# Altium PCB IPG_Rigid.PcbDoc (part 10 of 13)
Units mm, origin at the board's own origin, x right, y up, seen from the top; angles counter-clockwise.
Board outline 69.6 x 90.73 mm, 10 copper layers (TOP, DHOR, DVERT, GND 1, POWER, GND 2, GND 3, AVERT, AHOR, BOT), stack 1.198 mm thick; 745 components, 398 nets, 1997 pads, 2678 vias.
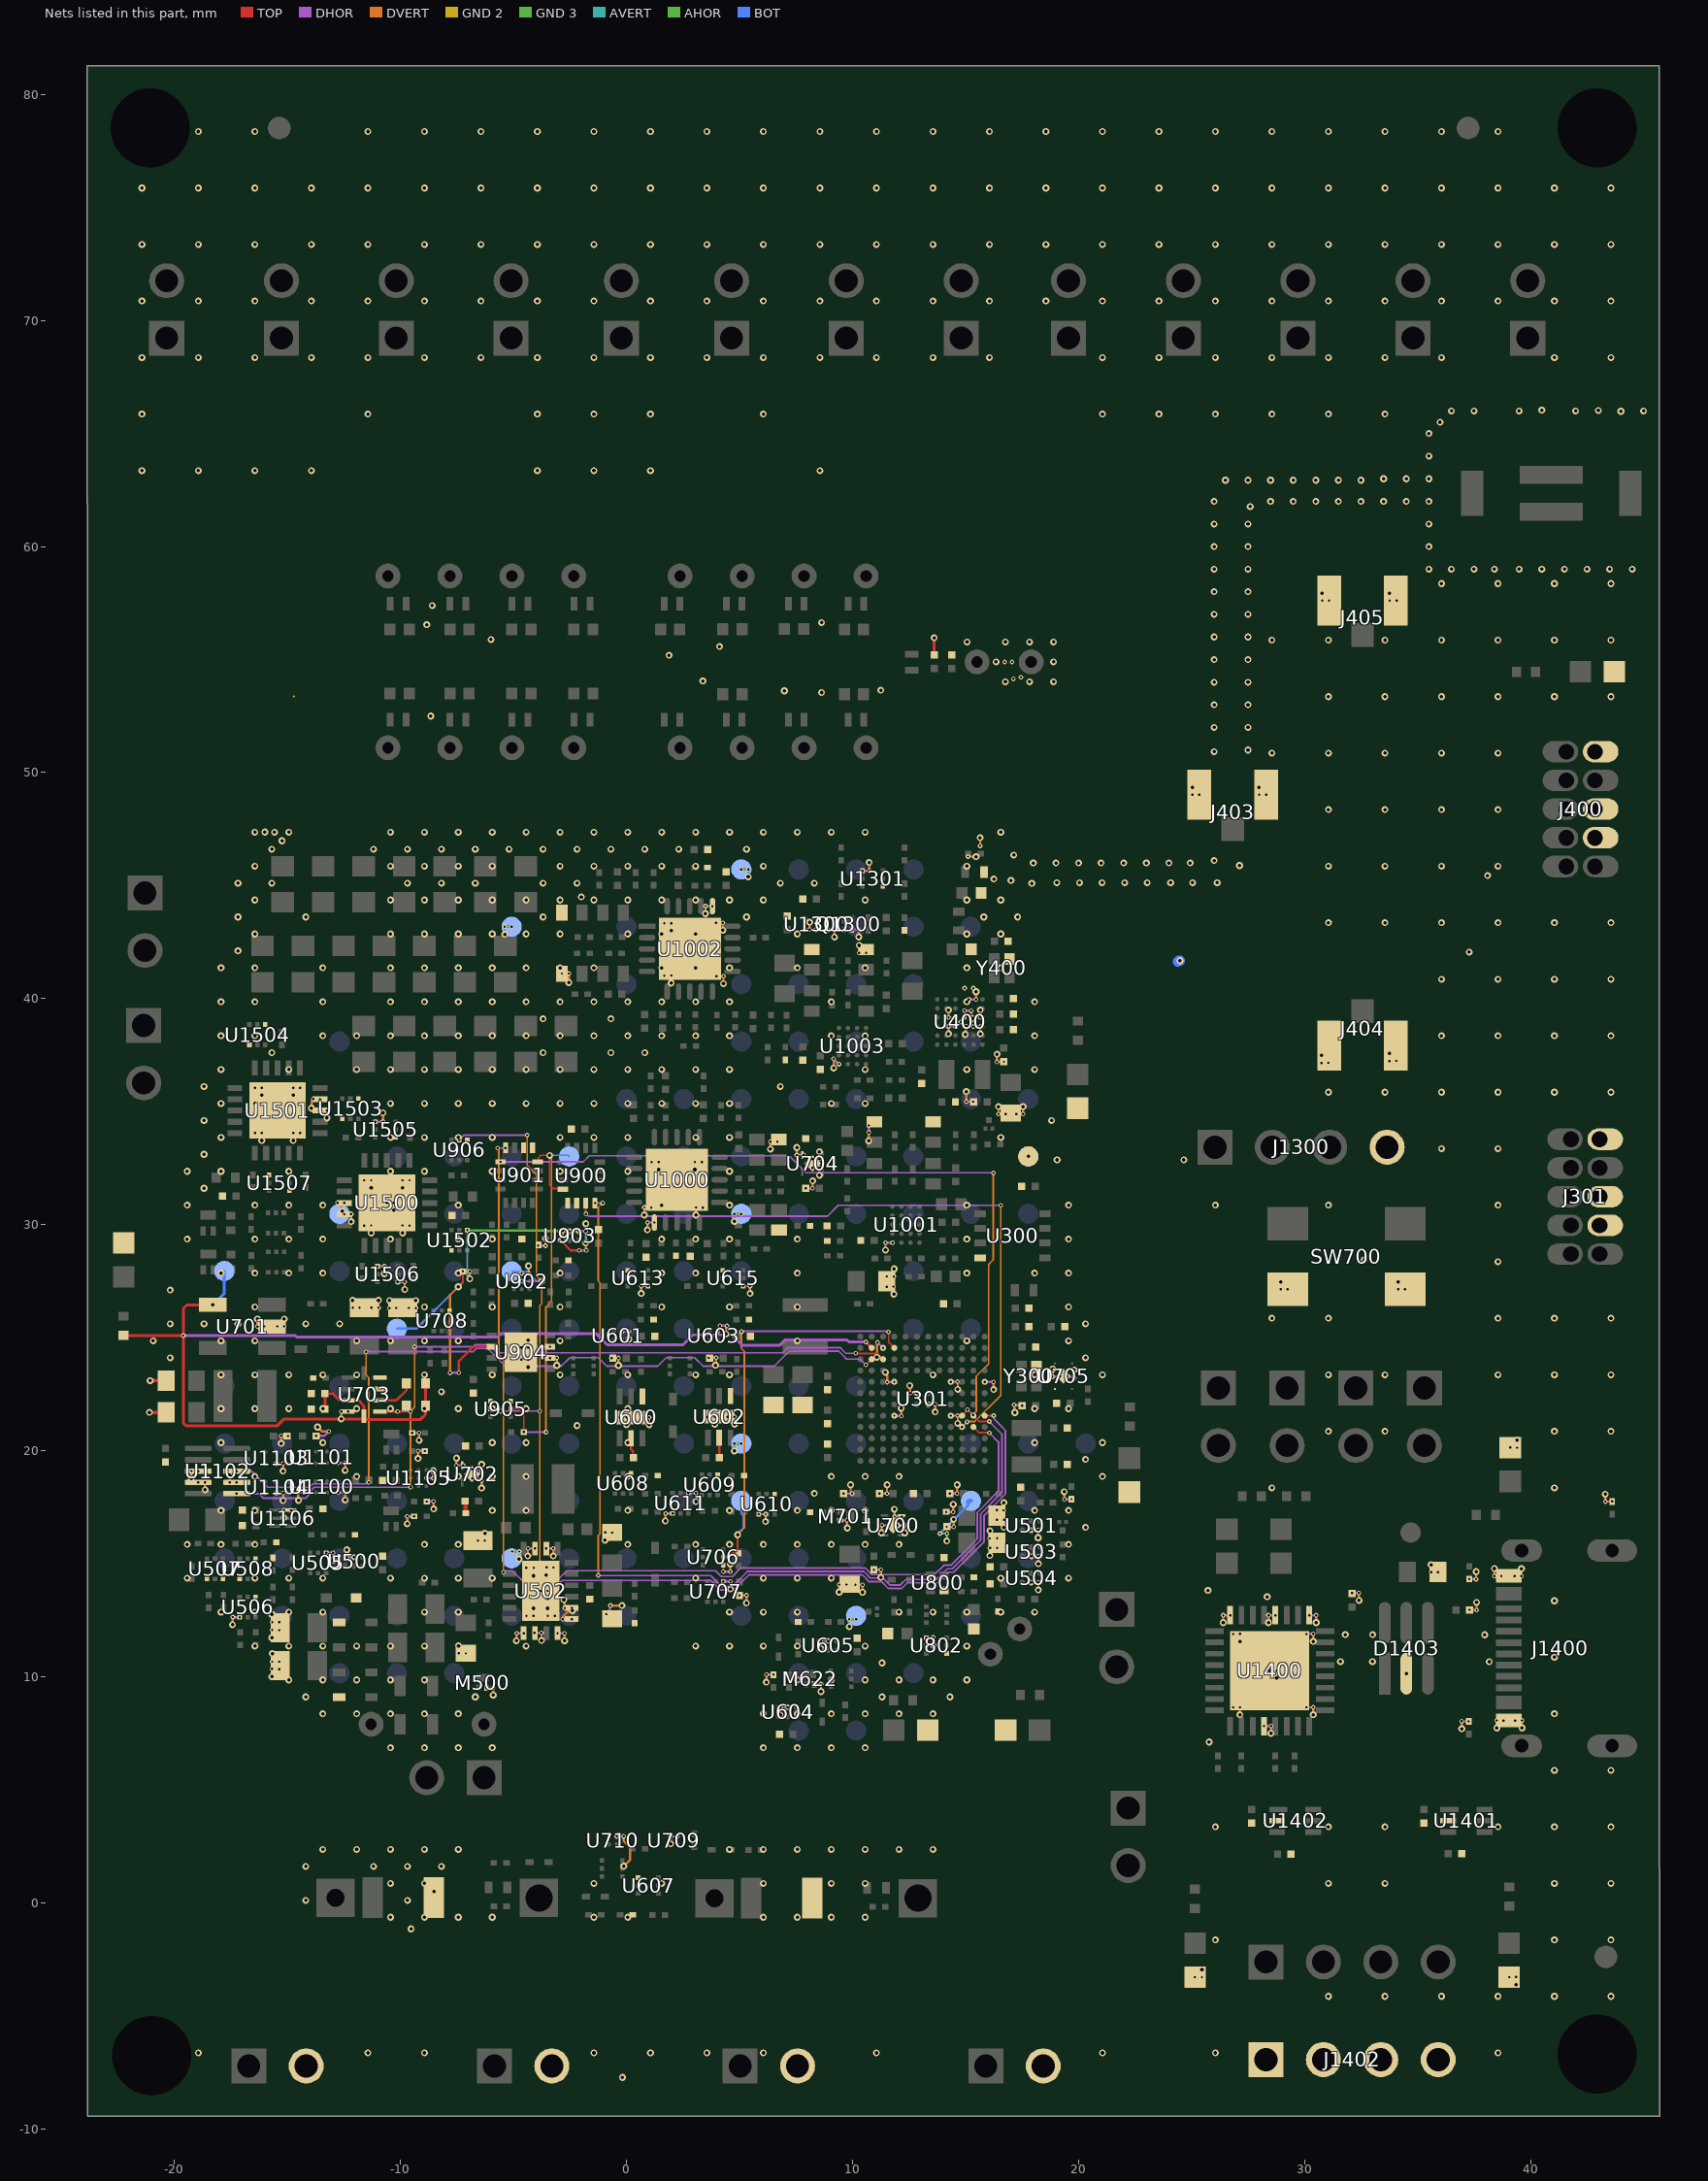
[diagram p14: the nets of this part, all layers, seen from the top]

## Via types
v1: diameter 0.203, hole 0.102, TOP to DHOR, tented top, 561 vias
v2: diameter 0.203, hole 0.102, DHOR to DVERT, tented top, 481 vias
v3: diameter 0.305/0.305/0.305/0.305/0.305/0.305 (per signal layer), hole 0.152, DVERT to AVERT, 397 vias
v4: diameter 0.305/0.305/0/0.305/0.305/0.305 (per signal layer), hole 0.152, DVERT to AVERT, tented top, 283 vias
v5: diameter 0.305/0.305/0.305/0.305/0/0.305/0.305/0.305/0.305/0.305 (per signal layer), hole 0.152, TOP to BOT, 259 vias
v6: diameter 0.305, hole 0.152, TOP to BOT, tented both sides, 169 vias
v7: diameter 0.305/0.305/0.305/0.305/0/0.305/0.305/0.305/0.305/0.305 (per signal layer), hole 0.152, TOP to BOT, tented both sides, 140 vias
v8: diameter 0.203, hole 0.102, AVERT to AHOR, tented top, 101 vias
v9: diameter 0.305/0.305/0.305/0.305/0.305/0.305 (per signal layer), hole 0.152, DVERT to AVERT, tented top, 79 vias
v10: diameter 0.305/0/0/0.305/0/0.305/0.305/0/0/0.305 (per signal layer), hole 0.152, TOP to BOT, tented both sides, 74 vias
v11: diameter 0.305/0.305/0.305/0.305/0.305/0.305/0.305/0.305/0.305/0.305 (per signal layer), hole 0.152, TOP to BOT, tented both sides, 66 vias
v12: diameter 0.203, hole 0.102, AHOR to BOT, tented both sides, 31 vias
v13: diameter 0.203, hole 0.102, DHOR to DVERT, tented both sides, 9 vias
v14: diameter 0.203/0.203 (per signal layer), hole 0.102, DHOR to DVERT, tented top, 7 vias
v15: diameter 0.203/0.203 (per signal layer), hole 0.102, TOP to DHOR, tented top, 7 vias
v16: diameter 0.203, hole 0.102, TOP to DHOR, tented both sides, 5 vias
v17: diameter 0.305, hole 0.152, DVERT to AVERT, tented both sides, 2 vias
v18: diameter 0.305/0.305/0/0.305/0.305/0.305 (per signal layer), hole 0.152, DVERT to AVERT, tented both sides, 2 vias
v19: diameter 0.305, hole 0.152, DVERT to AVERT, tented top, 2 vias
v20: diameter 0.305/0/0/0.305/0.305/0.305/0.305/0/0/0.305 (per signal layer), hole 0.152, TOP to BOT, tented both sides, 1 vias
v21: diameter 0.305/0.305/0/0.305/0.305/0.305 (per signal layer), hole 0.152, DVERT to AVERT, 1 vias
v22: diameter 0.203, hole 0.102, TOP to BOT, tented top, 1 vias

## Nets (pads, with @x,y where several pads share a name; then routed paths per layer and width w, separated by ;. In a path a pad name is that pad's centre, name@x,y a point inside that pad or via, vN(x,y) a via of type N, cw(c..) or ccw(c..) an arc to the next point about the centre after c; other vN are vias at no path point) (continued)
GND: C300.1 C301.2 C302.1 C303.2 C304.1 C305.1 C306.1 C307.1 C308.1 C309.1 C310.1 C311.1 C312.1 C313.2 C314.2 C315.1 C316.1 C317.2 C318.1 C319.2 C320.1 C400.2 C401.1 C402.1 C403.2 C404.1 C405.2 C406.1 C407.1 C408.1 C409.1 C410.2 C504.1 C505.1 C508.2 C509.2 C510.1 C511.1 C512.2 C514.1 C515.1 C516.1 C517.1 C600.2 C601.1 C602.1 C603.2 C604.1 C605.1 C606.1 C607.1 C700.1 C701.2 C702.2 C703.2 C704.2 C705.2 C706.1 C707.1 C708.1 C709.1 C710.1 C711.1 C712.1 C713.1 C714.1 C800.2 C801.1 C802.1 C900.1 C901.1 C902.1 C903.1 C906.1 C1003.1 C1004.1 C1005.1 C1006.1 C1018.2 C1019.1 C1020.1 C1021.2 C1100.1 C1102.1 C1109.1 C1112.1 C1114.1 C1115.1 C1117.1 C1200.1 C1215.1 C1300.1 C1302.1 C1400.2 C1401.1 C1402.1 C1404.2 C1405.1 C1406.1 C1407.1 C1500.1 C1501.1 D301.K D401.K D402.K D502.2 D503.2 D504.2 D704.K D705.K D802.K D1004.2 D1005.2 D1006.2 D1007.2 D1012.2 D1013.2 D1014.2 D1015.2 D1400.K D1401.K D1402.K D1403.2 F600.2 F601.2 J301.3 J301.5 J301.9 J400.3 J400.5 J400.9 J403.2 J403.3 J404.2 J404.3 J405.2 J405.3 J504.2 J505.2 J602.2 J605.2 J1300.4 J1400.A1 J1400.A12 J1402.1 J1402.2 J1402.3 J1402.4 L401.1 M500.2 M622.2 M701.2 Q1300.2 R301.1 R508.1 R511.2 R512.2 R517.2 R520.2 R523.2 R604.2 R610.1 R617.2 R622.1 R624.1 R627.2 R630.2 R702.2 R711.2 R716.1 R717.1 R804.2 R914.2 R1008.2 R1010.2 R1039.1 R1041.2 R1149.2 R1150.1 R1152.2 R1153.1 R1305.1 R1405.2 R1409.2 R1410.2 SW700.3 SW700.4 TP609.1 TP610.1 TP611.1 TP612.1 TP613.1 TP614.1 TP615.1 TP616.1 TP617.1 TP625.1 U300.4 U301.E4 U301.E9 U301.F6 U301.G7 U301.H1 U301.H4 U301.H9 U301.L10 U400.B3 U400.B4 U400.C1 U400.D3 U400.D4 U400.E3 U400.E4 U500.B1 U501.B1 U502.7 U502.8 U502.10 U502.11 U502.12 U502.18 U502.19 U502.21 U503.B1 U504.B1 U505.1 U506.1 U506.4 U507.1 U507.3 U508.1 U508.4 U600.1 U600.5 U600.7 U601.B2 U602.1 U602.5 U602.7 U603.B2 U604.B1 U605.B1 U607.1 U608.1 U609.1 U610.1 U610.4 U611.1 U611.4 U613.1 U613.4 U615.1 U615.4 U700.2 U700.5 U701.2 U702.2 U702.5 U703.3 U703.4 U703.9 U704.2 U704.5 U705.3 U705.5 U706.1 U707.1 U708.1 U709.B2 U710.B2 U800.4 U802.1 U802.4 U900.5 U900.6 U901.5 U901.6 U902.A2 U903.B1 U904.6 U904.9 U905.1 U906.1 U1000.16 U1000.21 U1001.A1 U1002.16 U1002.21 U1003.A1 U1100.1 U1100.4 U1101.4 U1102.3 U1102.4 U1102.7 U1103.2 U1104.2 U1105.A2 U1106.3 U1300.2 U1300.3 U1301.1 U1301.4 U1400.4 U1400.17 U1400.20 U1400.24 U1400.33 U1401.2 U1402.2 U1500.3 U1500.4 U1500.21 U1501.3 U1501.4 U1501.21 U1502.1 U1502.4 U1503.1 U1503.4 U1504.1 U1504.4 U1505.1 U1505.4 U1506.1 U1506.4 U1507.1 U1507.4 Y300.4 Y400.4 | length 140.4
  TOP w0.076: U603.B2@4.031,25.262 4.054,25.286 4.054,25.421 4.133,25.5 v1(4.133,25.534) ; U706.1@4.283,14.941 4.285,14.939 4.285,14.653 v1(4.288,14.65) ; C1021.2@4.4,45.545 C1021.2@4.4,45.63 ; C1006.1@10.332,29.308 C1006.1@10.337,29.304
  TOP w0.102: U507.1@-18.575,14.346 U507.1@-18.562,14.333 ; U507.3@-17.875,14.346 U507.3@-17.862,14.333 ; U506.4@-17.13,12.651 U506.4@-17.117,12.638 ; U508.1@-17.127,14.346 U508.1@-17.114,14.333 ; U506.1@-16.417,13.538 U506.1@-16.38,13.574 ; D504.2@-12.728,9.113 D504.2@-12.715,9.1 ; D503.2@-12.728,12.413 D503.2@-12.715,12.4 ; U500.B1@-12.072,15.284 U500.B1@-12.065,15.291 v1(-12.058,15.298) ; C512.2@-7.315,11.047 C512.2@-7.302,11.034 ; C512.2@-6.909,11.024 C512.2@-6.896,11.036 ; U502.7@-4.563,11.938 v1(-4.548,11.925) ; U502.8@-4.05,11.925 U502.8@-4.037,11.938 ; v1(-2.425,12.55) U502.11@-2.412,12.537 ; U502.12@-2.425,13.05 U502.12@-2.412,13.063 ; U600.5@0.2,20.55 0.2,20.058 0.3,19.958 C600.2@0.3,19.7 ; C603.2@4.1,19.7 4.102,19.7 4.102,20.575 U602.5@4.1,20.575 ; v1(9.398,37.1) U1003.A1@9.4,37.1 ; v1(14.793,38.968) 14.793,38.948 14.953,38.788 U400.D4@14.953,38.768 ; v1(14.949,39.466) 14.951,39.464 14.951,39.17 14.949,39.168 U400.D3@14.953,39.168
  TOP w0.127: C1200.1@13.614,55.208 v5(13.614,55.962) ; C410.2@17.141,38.612 C410.2@17.151,38.621
  TOP w0.152: v10(-21.076,23.1) C702.2@-20.375,23.1 ; v10@-21.028,21.7 C701.2@-20.375,21.7
  TOP w0.203: C707.1@-7.133,17.774 -7.123,17.765 -7.123,17.244 R716.1@-7.114,17.234
  TOP w0.5: v11(-8.509,0.506) F600.2@-8.331,0.327
  GND 3 w0.127: v21@16.346,37.541 v21(16.394,37.541)
  DVERT w0.102: v4(-19.253,18.771) v2(-19.253,19.102) ; v4(-18.647,18.271) v2(-18.647,18.602) ; v2(-17.553,18.598) v4(-17.553,18.929) ; v4@-17.43,12.328 -17.424,12.333 -17.424,12.634 v2(-17.418,12.64) ; v2(-16.33,25.498) v4(-16.33,25.829) ; v4(-16.138,33.725) v2(-16.138,34.056) ; v4(-16.138,35.725) v2(-16.138,36.056) ; v4(-15.686,12.762) -15.68,12.757 -15.68,12.425 v2(-15.675,12.42) ; v4@-15.684,11.757 -15.68,11.76 -15.68,12.069 v2(-15.677,12.072) ; v4@-15.682,10.03 v2(-15.682,10.352) ; v2(-15.674,10.669) v4(-15.674,11.024) ; v4(-15.28,20.326) v2(-15.28,20.657) ; v4(-15.197,17.796) v2(-15.197,18.127) ; v4(-15.197,19.103) v2(-15.197,19.433) ; v4(-15.162,17.039) v2(-15.162,17.37) ; v2(-15.147,25.5) v4(-15.147,25.831) ; v4(-14.748,33.725) v2(-14.748,34.056) ; v4(-14.748,35.725) v2(-14.748,36.056) ; v2(-14.553,18.148) -14.534,18.129 -14.534,17.826 v4(-14.514,17.806) ; v4(-13.945,35.154) -13.929,35.169 -13.929,35.458 -13.861,35.526 v2(-13.861,35.554) ; v3(-13.667,21.047) -13.469,20.849 v2(-13.176,20.849) ; v4(-13.255,34.723) v2(-13.255,35.054) ; v2@-12.986,15.491 -12.981,15.485 -12.981,15.184 v4@-12.975,15.179 ; v2(-12.79,30.967) -12.79,30.951 -12.618,30.779 -12.618,30.639 v4(-12.579,30.6) ; v4(-12.619,21.405) v2(-12.619,21.736) ; v4(-12.447,17.821) v2(-12.447,18.152) ; v4(-12.447,19.128) v2(-12.447,19.458) ; v2@-12.374,15.278 v4@-12.374,15.605 ; v4(-12.18,30.136) v2(-12.18,30.467) ; v2(-12.114,26.325) v4(-12.114,26.656) ; v4(-11.295,29.636) v2(-11.295,29.967) ; v4(-11.295,31.636) v2(-11.295,31.967) ; v2(-10.975,26.323) v4(-10.975,26.654) ; v2(-10.776,34.562) v3(-10.776,34.95) ; v4(-10.713,27.834) v2(-10.713,28.165) ; v2(-10.488,26.312) v4(-10.488,26.643) ; v4(-10.295,30.636) v2(-10.295,30.967) ; v4(-9.905,29.636) v2(-9.905,29.967) ; v4(-9.905,31.636) v2(-9.905,31.967) ; v4(-9.813,27.134) v2(-9.813,27.465) ; v4(-9.704,16.767) v2(-9.704,17.098) ; v2(-9.324,26.314) v4(-9.324,26.645) ; v4(-9.225,19.66) v2(-9.225,19.991) ; v4(-9.179,20.46) v2(-9.179,20.791) ; v2(-8.547,18.785) v4(-8.547,19.116) ; v4(-8.534,17.428) v2(-8.534,17.759) ; v2(-7.526,19.345) v4(-7.526,19.676) ; v4@-7.427,11.342 -7.426,11.341 v2(-7.424,11.035) v2(-7.424,11.035) ; v4(-6.411,18.345) v2(-6.411,18.676) ; v2(-6.411,19.068) v4(-6.411,19.399) ; v2@-6.271,16.021 -6.266,16.027 -6.266,16.327 v4@-6.26,16.333 ; v4(-5.897,9.188) v2(-5.897,9.518) ; v4@-4.865,11.617 -4.859,11.623 -4.859,11.923 v2(-4.854,11.929) ; v4@-4.365,15.367 -4.359,15.373 -4.359,15.673 v2(-4.354,15.679) ; v4(-4.345,23.7) v2(-4.345,24.03) ; v2(-4.345,24.56) v4(-4.345,24.891) ; v2(-4.333,27.843) v4(-4.333,28.174) ; v2@-4.121,12.696 -4.116,12.702 -4.116,13.002 v4@-4.11,13.008 ; v4@-4.111,14.493 -4.111,14.825 v2(-4.106,14.829) ; v2@-3.767,11.943 -3.761,11.937 -3.761,11.636 v4@-3.755,11.631 ; v4@-3.55,14.526 -3.544,14.531 -3.544,14.832 v2(-3.539,14.838) ; v2(-3.495,13.804) -3.491,13.798 -3.491,13.498 v4@-3.485,13.492 ; v4@-3.49,13.008 -3.484,13.002 -3.484,12.702 v2(-3.479,12.696) ; v2@-3.246,15.679 -3.241,15.673 -3.241,15.373 v4@-3.235,15.367 ; v4(-3.084,23.775) v2(-3.084,24.106) ; v2(-2.824,12.55) -2.804,12.57 -2.804,12.675 -2.592,12.887 -2.427,12.887 v4(-2.389,12.925) ; v4(-2.82,29.385) v2(-2.82,29.716) ; v4(-2.772,13.407) -2.748,13.383 -2.748,13.066 v2(-2.729,13.046) ; v2(-2.745,11.929) -2.741,11.923 -2.741,11.623 v4@-2.735,11.617 ; v3(-2.554,40.716) v2(-2.554,41.112) ; v4@-0.95,16.071 -0.945,16.077 -0.945,16.378 v2(-0.939,16.383) ; v2(-0.711,13.154) v4(-0.199,13.154) ; v4(-0.359,23.773) v2(-0.359,24.104) ; v2(-0.129,2.943) -0.129,2.744 0.165,2.45 0.165,1.909 v9(-0.12,1.624) ; v4(0.005,21.148) v2(0.005,21.479) ; v4(0.104,24.936) v2(0.104,25.266) ; v4(0.653,26.958) v2(0.653,27.289) ; v4(0.789,30.431) v2(0.789,30.761) ; v4(0.927,29.769) v2(0.927,30.1) ; v4(1.005,21.148) v2(1.005,21.479) ; v4(1.421,32.437) v2(1.421,32.768) ; v4@1.725,16.918 1.73,16.924 1.73,17.225 v2(1.736,17.23) ; v9(1.955,2.612) v2(1.955,2.943) ; v4(1.979,40.692) v2(1.979,41.023) ; v4(1.979,43.004) v2(1.979,43.334) ; v4(3.024,32.437) v2(3.024,32.768) ; v4(3.071,17.753) 3.072,17.754 v2(3.073,18.126) v2(3.073,18.126) ; v4(3.075,30.431) v2(3.075,30.761) ; v4(3.495,43.764) v2(3.495,44.094) ; v4(3.905,21.173) v2(3.905,21.504) ; v4(3.937,23.783) 3.952,23.798 3.952,24.097 v2(3.968,24.112) ; v4(4.265,43.029) v2(4.265,43.36) ; v4(4.291,40.667) v2(4.291,40.998) ; v4(4.406,25.161) 4.406,25.455 4.447,25.496 v2(4.447,25.523) ; v2@4.597,14.657 4.594,14.66 4.594,14.96 v4@4.597,14.962 ; v4@4.598,13.909 v2@4.598,14.218 ; v4(4.78,21.173) v2(4.78,21.504) ; v4@5.313,13.291 5.314,13.292 5.314,13.607 v2(5.315,13.608) ; v4(5.468,26.957) v2(5.468,27.288) ; v4(6.156,16.865) v2(6.156,17.196) ; v4@6.188,9.783 6.193,9.788 6.193,10.089 v2(6.199,10.095) ; v4(6.367,33.342) v2(6.367,33.673) ; v2(6.809,8.649) 6.812,8.646 6.812,8.34 v4@6.816,8.337 ; v2(7.537,33.084) v4(7.537,33.414) ; v2(8.103,43.05) v4(8.103,43.381) ; v2(8.235,31.609) v4(8.235,31.939) ; v4(8.535,32.186) v2(8.535,32.516) ; v2(8.535,32.896) v4(8.535,33.227) ; v4@8.6,11.275 v2(8.6,11.582) ; v4(8.606,9.346) v2(8.606,9.677) ; v4(9.169,36.932) v2(9.169,37.338) ; v4(9.201,42.723) v2(9.201,43.054) ; v4@9.415,13.773 v2(9.415,14.079) ; v2(9.754,16.921) 9.759,16.915 9.759,16.614 v4@9.765,16.609 ; v3(9.917,18.491) 9.917,18.191 9.982,18.126 v2(9.982,18.099) ; v4(10.276,42.733) v2(10.276,43.064) ; v2(10.299,42.026) v4(10.299,42.357) ; v4@10.447,13.762 v2(10.447,14.07) ; v3(10.719,33.706) v2(10.719,34.087) ; v2(10.74,45.657) v3(10.74,46.025) ; v4(11.074,24.13) 11.089,24.145 11.089,24.776 v2(11.104,24.79) ; v2(11.25,14.739) 11.255,14.733 11.255,14.432 v4@11.26,14.427 ; v4@11.285,16.392 11.291,16.398 11.291,16.698 v2(11.296,16.704) ; v4(11.454,23.464) 11.454,23.409 11.539,23.325 11.539,23.039 v2(11.543,23.035) ; v4(11.462,28.877) v2(11.462,29.208) ; v2(11.528,18.107) v3(11.528,18.491) ; v4@11.82,26.957 v2@11.82,27.258 ; v2(11.825,27.709) 11.831,27.715 11.831,28.016 v4@11.836,28.021 ; v4@11.86,17.396 11.866,17.39 11.866,17.09 v2(11.871,17.084) ; v4(12.151,21.886) 12.153,21.884 12.153,21.548 v2@12.154,21.546 ; v2@12.304,16.704 12.309,16.698 12.309,16.398 v4@12.315,16.392 ; v4@12.535,22.858 12.538,22.855 12.538,22.554 v2(12.542,22.551) ; v2(13.57,11.737) 13.574,11.733 13.574,11.423 v4@13.579,11.419 ; v2@13.654,22.054 13.659,22.048 13.659,21.748 v4@13.665,21.742 ; v4(14.251,38.441) v2(14.251,38.772) ; v2(14.251,39.164) v4(14.251,39.495) ; v2(14.453,17.293) 14.457,17.299 14.457,17.6 v4@14.463,17.605 ; v4(14.469,16.959) 14.473,16.956 14.473,16.626 v2(14.476,16.623) ; v2(14.631,18.106) v3(14.631,18.491) ; v2@14.654,21.554 14.659,21.548 14.659,21.248 v4@14.665,21.242 ; v2@14.654,23.054 14.659,23.048 14.659,22.748 v4@14.665,22.742 ; v4(14.99,38.417) 15.016,38.443 15.016,38.756 v2(15.035,38.776) ; v2@15.037,35.469 v18(15.037,35.89) ; v13(15.112,46.284) v9(15.468,46.284) ; v2(15.254,39.462) 15.265,39.451 15.265,39.113 v4(15.275,39.102) ; v4@15.454,40.306 15.456,40.304 v4@15.456,40.208 ; v2@15.456,39.971 v2@15.466,39.961 ; v2(15.466,39.967) v4(15.466,40.306) ; v13(15.646,46.761) v9(15.646,47.117) ; v4(15.654,38.441) v2(15.654,38.772) ; v2(15.654,39.164) v4(15.654,39.495) ; v2(16.063,16.119) 16.071,16.127 16.071,16.424 v4@16.084,16.437 ; v4@16.082,15.39 v2@16.082,15.696 ; v2(16.237,23.047) 16.243,23.041 16.243,22.74 v4@16.25,22.733 ; v2(16.394,37.201) v21(16.394,37.541) ; v2(16.463,34.896) v4(16.463,35.226) ; v2(16.695,17.365) 16.696,17.366 16.696,17.68 v4@16.698,17.682 ; v4@16.698,16.634 16.702,16.639 16.702,16.941 v2(16.707,16.946) ; v2(17.153,22.035) 17.168,22.021 17.168,21.706 v4(17.182,21.691) ; v2(17.548,34.896) v4(17.548,35.226) ; v2(18.215,16.494) 18.218,16.491 18.218,16.181 v4@18.22,16.178 ; v2(18.221,14.175) 18.223,14.174 18.223,13.867 v4@18.225,13.865 ; v4@18.229,15.022 18.233,15.026 18.233,15.329 v2(18.237,15.332) ; v2(18.844,23.27) 18.852,23.278 18.852,23.589 v4@18.864,23.602 ; v4@19.372,18.166 19.374,18.163 19.374,17.852 v2(19.377,17.849) ; v4@19.816,23.59 19.816,23.224 v2(19.821,23.22) ; v2(25.042,49.018) v4(25.042,49.349) ; v2(25.461,-3.29) v4(25.461,-2.959) ; v4(26.406,12.394) v2(26.406,12.725) ; v4(27.143,8.32) v2(27.143,8.651) ; v4(27.143,11.566) v2(27.143,11.897) ; v2(27.992,49.018) v4(27.992,49.349) ; v4(28.406,12.394) v2(28.406,12.725) ; v4(28.516,7.492) v2(28.516,7.823) ; v4(28.766,9.943) v2(28.766,10.274) ; v2(28.947,27.14) v4(28.947,27.471) ; v4(30.389,8.32) v2(30.389,8.651) ; v4(30.389,11.566) v2(30.389,11.897) ; v4(30.516,12.394) v2(30.516,12.725) ; v2(30.748,37.156) v4(30.748,37.487) ; v2(30.783,57.608) v4(30.783,57.939) ; v4(32.411,13.374) v2(32.411,13.705) ; v2(33.758,37.241) v4(33.758,37.572) ; v2(33.768,57.603) v4(33.768,57.934) ; v2(34.147,27.14) v4(34.147,27.471) ; v2(35.6,14.626) v4(35.6,14.957) ; v4(36.957,7.7) v2(36.957,8.031) ; v2(37.592,14.321) v4(37.592,14.652) ; v2(37.611,12.959) v4(37.611,13.29) ; v2(38.399,14.459) v4(38.399,14.79) ; v4(38.506,7.738) v2(38.506,8.069) ; v4(39.361,-3.613) v2(39.361,-3.282) ; v2(39.411,20.138) v4(39.411,20.469) ; v2(39.599,14.457) v4(39.599,14.788) ; v4(39.624,7.736) v2(39.624,8.067) ; v2(43.307,17.751) v4(43.307,18.082)
  GND 2 w0.305: v9(-15.24,46.981) v9@-15.24,46.99
  AVERT w0.102: v4@-5.392,42.875 v8@-5.392,43.176 ; v4@-4.748,15.236 v8@-4.748,15.536 ; v4@4.769,20.015 v8@4.769,20.316 ; v4@4.769,30.176 v8@4.769,30.476 ; v4@5.392,45.415 v8@5.392,45.716 ; v4@9.848,12.242 v8@9.848,12.543 ; v4@14.179,16.033 v8@14.179,16.333
  DHOR w0.102: v2@-19.252,19.102 -19.25,19.1 -18.95,19.1 v1(-18.948,19.098) ; v1(-18.952,18.598) -18.95,18.6 -18.65,18.6 v2@-18.648,18.602 ; v2@-17.552,18.598 -17.55,18.6 -17.25,18.6 v1(-17.248,18.602) ; v2(-17.418,12.64) -17.416,12.638 -17.117,12.638 v1@-17.115,12.636 ; v1(-16.443,34.052) -16.441,34.054 -16.142,34.054 v2(-16.138,34.056) ; v1(-16.443,36.052) -16.441,36.054 -16.142,36.054 v2(-16.138,36.056) ; v2(-16.33,25.498) -16.327,25.5 -16.027,25.5 v1(-16.025,25.502) ; v2(-15.682,10.352) -15.675,10.345 -15.374,10.345 v1(-15.367,10.338) ; v2(-15.677,12.072) -15.674,12.069 -15.373,12.069 v1(-15.369,12.065) ; v2(-15.675,12.42) v1(-15.367,12.421) ; v2@-15.673,10.668 v1(-15.367,10.668) ; v1(-15.502,18.123) -15.5,18.125 -15.2,18.125 v2@-15.198,18.127 ; v1(-15.502,19.429) -15.5,19.431 -15.2,19.431 v2@-15.198,19.433 ; v1(-15.452,25.504) -15.45,25.502 -15.15,25.502 v2@-15.148,25.5 ; v2(-15.28,20.657) -15.276,20.655 -14.976,20.655 v1(-14.975,20.653) ; v2(-15.162,17.37) -15.159,17.368 -14.859,17.368 v1(-14.857,17.366) ; v2(-14.748,34.056) -14.745,34.054 -14.445,34.054 v1(-14.443,34.052) ; v2(-14.748,36.056) -14.745,36.054 -14.445,36.054 v1(-14.443,36.052) ; v2(-14.553,18.148) -14.55,18.15 -14.25,18.15 v1(-14.248,18.152) ; v2(-13.861,35.554) -13.858,35.552 -13.558,35.552 v1(-13.556,35.55) ; v1(-13.736,20.667) -13.357,20.667 v2(-13.176,20.849) ; v1(-13.56,35.05) -13.558,35.052 -13.259,35.052 v2@-13.257,35.054 ; v1(-13.29,15.487) -13.288,15.489 -12.988,15.489 v2@-12.986,15.491 ; v2(-12.79,30.967) -12.787,30.965 -12.487,30.965 v1(-12.485,30.963) ; v1(-12.752,18.148) -12.75,18.15 -12.45,18.15 v2@-12.448,18.152 ; v1(-12.752,19.454) -12.75,19.456 -12.45,19.456 v2@-12.448,19.458 ; v2@-12.617,21.736 -12.615,21.734 -12.316,21.734 v1(-12.314,21.732) ; v1(-12.485,30.463) -12.483,30.465 -12.184,30.465 v2@-12.182,30.467 ; v2(-12.374,15.277) -12.364,15.288 -12.068,15.288 v1(-12.058,15.298) ; v2(-12.114,26.325) -12.111,26.327 -11.811,26.327 v1(-11.809,26.329) ; v1(-11.6,29.963) -11.598,29.965 -11.299,29.965 v2(-11.295,29.967) ; v1(-11.6,31.963) -11.598,31.965 -11.299,31.965 v2(-11.295,31.967) ; v1(-11.28,26.327) -11.278,26.325 -10.978,26.325 v2(-10.975,26.323) ; v1(-11.118,34.558) -11.116,34.56 -10.779,34.56 v2@-10.777,34.562 ; v1(-11.018,28.161) -11.016,28.163 -10.717,28.163 v2(-10.713,28.165) ; v1(-10.6,30.963) -10.598,30.965 -10.299,30.965 v2@-10.297,30.967 ; v2(-10.488,26.312) -10.485,26.314 -10.185,26.314 v1(-10.183,26.316) ; v1(-10.118,27.461) -10.116,27.463 -9.817,27.463 v2@-9.815,27.465 ; v2@-9.904,29.967 -9.902,29.965 -9.602,29.965 v1(-9.6,29.963) ; v2@-9.904,31.967 -9.902,31.965 -9.602,31.965 v1(-9.6,31.963) ; v2(-9.704,17.098) -9.7,17.096 -9.401,17.096 v1(-9.399,17.094) ; v1(-9.629,26.318) -9.627,26.316 -9.327,26.316 v2(-9.324,26.314) ; v1(-9.484,20.787) -9.482,20.789 -9.182,20.789 v2(-9.179,20.791) ; v2@-9.224,19.991 -9.222,19.989 -8.922,19.989 v1(-8.92,19.987) ; v1(-8.852,18.789) -8.85,18.787 -8.55,18.787 v2(-8.547,18.785) ; v1(-8.839,17.755) -8.837,17.757 -8.537,17.757 v2(-8.534,17.759) ; v2@-7.524,19.345 -7.522,19.347 -7.223,19.347 v1(-7.221,19.349) ; v2(-7.424,11.035) v1@-7.113,11.035 ; v1(-6.833,18.774) -6.831,18.776 -6.51,18.776 v2(-6.411,18.676) ; v1(-6.833,19.174) -6.831,19.172 -6.514,19.172 v2(-6.411,19.068) ; v1(-6.575,16.025) -6.573,16.023 -6.273,16.023 v2@-6.271,16.021 ; v2@-6.414,18.674 v2(-6.411,18.676) ; v2@-6.414,19.07 v2(-6.411,19.068) ; v1(-6.202,9.514) -6.2,9.516 -5.901,9.516 v2(-5.897,9.518) ; v2(-4.854,11.929) -4.852,11.927 -4.552,11.927 v1(-4.548,11.925) ; v1(-4.65,24.026) -4.648,24.028 -4.349,24.028 v2(-4.345,24.03) ; v1(-4.65,24.564) -4.648,24.562 -4.349,24.562 v2(-4.345,24.56) ; v1(-4.638,27.847) -4.636,27.845 -4.336,27.845 v2(-4.333,27.843) ; v1(-4.431,14.824) -4.428,14.826 -4.109,14.826 v2(-4.106,14.829) ; v1(-4.425,12.7) -4.423,12.698 -4.123,12.698 v2@-4.121,12.696 ; v2(-4.354,15.679) -4.352,15.677 -4.052,15.677 v1(-4.049,15.675) ; v1(-4.07,11.939) -4.068,11.941 -3.768,11.941 v2@-3.767,11.943 ; v1(-3.8,13.8) -3.798,13.802 -3.498,13.802 v2(-3.495,13.804) ; v1(-3.55,15.675) -3.548,15.677 -3.248,15.677 v2@-3.246,15.679 ; v2(-3.539,14.838) -3.537,14.836 -3.237,14.836 v1@-3.235,14.834 ; v2(-3.479,12.696) -3.477,12.698 -3.177,12.698 v1@-3.175,12.7 ; v1(-3.389,24.102) -3.387,24.104 -3.087,24.104 v2@-3.085,24.106 ; v1(-3.05,11.925) -3.048,11.927 -2.748,11.927 v2(-2.745,11.929) ; v1(-2.859,41.108) -2.857,41.11 -2.557,41.11 v2@-2.555,41.112 ; v2(-2.824,12.55) v1(-2.425,12.55) ; v2@-2.818,29.716 -2.816,29.714 -2.517,29.714 v1(-2.515,29.712) ; v2(-2.729,13.046) -2.727,13.048 -2.427,13.048 v1@-2.425,13.05 ; v2(-0.939,16.383) -0.937,16.381 -0.638,16.381 v1(-0.634,16.379) ; v1(-0.892,12.773) -0.891,12.802 -0.731,12.962 -0.731,13.135 v2(-0.711,13.154) ; v1(-0.664,24.1) -0.662,24.102 -0.362,24.102 v2@-0.36,24.104 ; v1(-0.434,2.939) -0.432,2.941 -0.132,2.941 v2(-0.129,2.943) ; v1(-0.3,21.475) -0.298,21.477 0.002,21.477 v2@0.004,21.479 ; v1(-0.202,25.262) -0.2,25.264 0.1,25.264 v2@0.102,25.266 ; v2@0.654,27.289 0.656,27.287 0.956,27.287 v1(0.958,27.285) ; v1(0.7,21.475) 0.702,21.477 1.002,21.477 v2@1.004,21.479 ; v2(0.789,30.761) 0.793,30.759 1.092,30.759 v1(1.094,30.757) ; v2@0.929,30.1 0.931,30.098 1.23,30.098 v1(1.232,30.096) ; v1(1.116,32.764) 1.118,32.766 1.417,32.766 v2(1.421,32.768) ; v1(1.674,41.019) 1.676,41.021 1.976,41.021 v2(1.979,41.023) ; v1(1.674,43.33) 1.676,43.332 1.976,43.332 v2(1.979,43.334) ; v2(1.736,17.23) 1.738,17.228 2.038,17.228 v1@2.04,17.226 ; v2(1.955,2.943) 1.958,2.941 2.258,2.941 v1(2.26,2.939) ; v1(2.736,18.126) v2(3.073,18.126) ; v2(3.024,32.768) 3.028,32.766 3.327,32.766 v1(3.329,32.764) ; v2(3.075,30.761) 3.079,30.759 3.378,30.759 v1(3.38,30.757) ; v2@3.496,44.094 3.498,44.093 3.798,44.093 v1(3.8,44.091) ; v1(3.6,21.5) 3.602,21.502 3.902,21.502 v2@3.904,21.504 ; v1(3.632,24.11) 3.633,24.111 v2(3.968,24.112) v2(3.968,24.112) ; v1(3.96,43.356) 3.962,43.358 4.262,43.358 v2(4.265,43.36) ; v1(3.986,40.994) 3.988,40.996 4.287,40.996 v2(4.291,40.998) ; v1(4.133,25.534) 4.138,25.529 4.442,25.529 v2(4.447,25.523) ; v1(4.283,14.217) 4.284,14.218 4.598,14.218 v2(4.599,14.219) ; v1(4.288,14.65) 4.29,14.652 4.589,14.652 v2@4.593,14.656 ; v1(4.475,21.5) 4.477,21.502 4.777,21.502 v2@4.779,21.504 ; v1(4.999,13.599) 5.003,13.603 5.311,13.603 v2(5.315,13.608) ; v1(5.163,27.284) 5.165,27.286 5.465,27.286 v2@5.467,27.288 ; v1(5.851,17.192) v1(5.851,17.192) 6.153,17.194 v2@6.155,17.196 ; v2(6.199,10.095) v2(6.199,10.095) 6.5,10.093 v1@6.502,10.091 ; v2(6.367,33.673) 6.371,33.671 6.67,33.671 v1(6.672,33.669) ; v2(6.809,8.649) 6.811,8.647 7.128,8.647 v1(7.13,8.645) ; v2@7.538,33.084 7.54,33.086 7.84,33.086 v1(7.842,33.088) ; v1(7.93,31.613) 7.932,31.611 8.231,31.611 v2@8.233,31.609 ; v2@8.104,43.05 8.106,43.052 8.406,43.052 v1(8.408,43.054) ; v1(8.23,32.513) 8.232,32.515 8.531,32.515 v2(8.535,32.516) ; v1(8.23,32.9) 8.232,32.898 8.531,32.898 v2(8.535,32.896) ; v1(8.301,9.673) 8.303,9.675 8.603,9.675 v2(8.606,9.677) ; v2(8.6,11.582) v1(8.915,11.582) ; v1(8.896,43.05) 8.898,43.052 9.198,43.052 v2@9.2,43.054 ; v2(9.169,37.338) 9.169,37.329 v1(9.398,37.1) ; v2(9.415,14.079) v1@9.73,14.08 ; v1@9.45,16.917 9.452,16.919 9.752,16.919 v2(9.754,16.921) ; v1(9.6,18.1) v2(9.982,18.099) ; v1(9.971,43.06) 9.973,43.062 10.273,43.062 v2@10.275,43.064 ; v1(10.133,14.07) v2@10.447,14.07 ; v2(10.299,42.026) 10.302,42.028 10.602,42.028 v1(10.604,42.03) ; v1(10.435,45.653) 10.437,45.655 10.737,45.655 v2@10.739,45.657 ; v2(10.719,34.087) 10.72,34.088 v1(10.721,34.392) v1(10.721,34.392) ; v1(10.945,14.735) 10.947,14.737 11.247,14.737 v2(11.25,14.739) ; v2(11.104,24.79) 11.108,24.79 11.349,24.549 v1(11.352,24.549) ; v1(11.2,18.1) 11.203,18.103 11.524,18.103 v2(11.528,18.107) ; v2(11.296,16.704) v2(11.296,16.704) 11.598,16.702 v1@11.6,16.7 ; v2(11.462,29.208) 11.465,29.206 11.765,29.206 v1(11.767,29.204) ; v1@11.513,27.262 v2@11.813,27.262 ; v1(11.52,27.713) 11.524,27.711 11.823,27.711 v2(11.825,27.709) ; v2(11.543,23.035) 11.55,23.043 11.843,23.043 v1(11.85,23.05) ; v1(11.85,21.55) 11.852,21.548 12.152,21.548 v2@12.154,21.546 ; v2(11.871,17.084) 11.873,17.086 12.173,17.086 v1@12.175,17.088 ; v1(12,16.7) 12.002,16.702 12.302,16.702 v2@12.304,16.704 ; v2(12.542,22.551) v1(12.85,22.55) ; v1(13.264,11.727) 13.269,11.732 13.565,11.732 v2(13.57,11.737) ; v1(13.35,22.05) 13.352,22.052 13.652,22.052 v2@13.654,22.054 ; v1(14.148,17.297) 14.15,17.295 14.45,17.295 v2(14.453,17.293) ; v1(14.168,16.637) 14.175,16.63 14.469,16.63 v2(14.476,16.623) ; v2(14.251,38.772) 14.255,38.77 14.555,38.77 v1(14.556,38.768) ; v2(14.251,39.164) 14.255,39.166 14.555,39.166 v1(14.556,39.168) ; v1(14.3,18.1) 14.303,18.103 14.627,18.103 v2(14.631,18.106) ; v1(14.35,21.55) 14.352,21.552 14.652,21.552 v2@14.654,21.554 ; v1(14.35,23.05) 14.352,23.052 14.652,23.052 v2@14.654,23.054 ; v1(14.793,38.968) 14.818,38.968 15.01,38.776 v2(15.035,38.776) ; v1(14.949,39.466) 14.951,39.464 15.25,39.464 v2(15.254,39.462) ; v2@15.038,35.442 15.04,35.444 15.34,35.444 v1(15.342,35.446) ; v1(15.152,39.967) 15.153,39.966 15.461,39.966 v2@15.466,39.961 ; v1(15.349,38.768) 15.351,38.77 15.65,38.77 v2@15.652,38.772 ; v1(15.349,39.168) 15.351,39.166 15.65,39.166 v2@15.652,39.164 ; v1(15.85,23.05) 15.851,23.049 v2(16.237,23.047) v2(16.237,23.047) ; v2(16.063,16.119) 16.068,16.124 16.394,16.124 v1(16.399,16.129) ; v2@16.082,15.697 v1@16.397,15.697 ; v1(16.383,16.942) 16.385,16.944 16.705,16.944 v2(16.707,16.946) ; v1(16.383,17.374) 16.387,17.369 16.691,17.369 v2(16.695,17.365) ; v2(16.394,37.201) 16.398,37.203 16.697,37.203 v1(16.699,37.205) ; v2(16.463,34.896) 16.466,34.898 16.766,34.898 v1(16.768,34.9) ; v2(17.153,22.035) 17.174,22.015 17.485,22.015 v1(17.502,21.998) ; v1(17.243,34.9) 17.245,34.898 17.544,34.898 v2@17.546,34.896 ; v1(17.906,16.486) 17.91,16.49 18.211,16.49 v2(18.215,16.494) ; v1(17.91,14.173) 17.912,14.174 18.22,14.174 v2(18.221,14.175) ; v1(17.915,15.33) 17.916,15.331 v2(18.237,15.332) v2(18.237,15.332) ; v2(18.844,23.27) 18.856,23.282 19.167,23.282 v1(19.179,23.294) ; v2(19.377,17.849) 19.381,17.854 19.683,17.854 v1(19.687,17.858) ; v1(19.502,23.292) 19.521,23.272 19.741,23.272 19.794,23.22 v2(19.821,23.22) ; v2@25.044,49.018 25.046,49.02 25.345,49.02 v1(25.347,49.022) ; v1(25.156,-3.286) 25.158,-3.288 25.457,-3.288 v2@25.459,-3.29 ; v2@26.407,12.725 26.409,12.723 26.709,12.723 v1(26.711,12.721) ; v1(26.838,8.647) 26.84,8.649 27.139,8.649 v2(27.143,8.651) ; v1(26.838,11.893) 26.84,11.895 27.139,11.895 v2(27.143,11.897) ; v2(27.992,49.018) 27.996,49.02 28.295,49.02 v1(28.297,49.022) ; v1(28.211,7.819) 28.213,7.821 28.512,7.821 v2@28.514,7.823 ; v2@28.407,12.725 28.409,12.723 28.709,12.723 v1(28.711,12.721) ; v1(28.461,10.27) 28.463,10.272 28.762,10.272 v2(28.766,10.274) ; v2@28.948,27.14 28.95,27.142 29.25,27.142 v1(29.252,27.144) ; v1(30.084,8.647) 30.086,8.649 30.385,8.649 v2(30.389,8.651) ; v1(30.084,11.893) 30.086,11.895 30.385,11.895 v2(30.389,11.897) ; v1(30.211,12.721) 30.213,12.723 30.512,12.723 v2(30.516,12.725) ; v2(30.748,37.156) 30.751,37.158 31.051,37.158 v1(31.053,37.16) ; v2@30.784,57.608 30.786,57.61 31.086,57.61 v1(31.088,57.612) ; v1(32.106,13.701) 32.108,13.703 32.407,13.703 v2(32.411,13.705) ; v2(33.758,37.241) 33.761,37.243 34.061,37.243 v1(34.063,37.245) ; v2@33.769,57.603 33.771,57.605 34.071,57.605 v1(34.073,57.607) ; v2(34.147,27.14) 34.15,27.142 34.45,27.142 v1(34.452,27.144) ; v2(35.6,14.626) 35.603,14.628 35.903,14.628 v1(35.905,14.63) ; v2@36.958,8.031 36.96,8.029 37.26,8.029 v1(37.262,8.027) ; v1(37.287,14.325) 37.289,14.323 37.589,14.323 v2(37.592,14.321) ; v1(37.306,12.963) 37.308,12.961 37.608,12.961 v2@37.61,12.959 ; v2(38.399,14.459) 38.403,14.461 38.702,14.461 v1(38.704,14.463) ; v2@38.508,8.069 38.51,8.067 38.809,8.067 v1(38.811,8.065) ; v1(39.056,-3.286) 39.058,-3.284 39.357,-3.284 v2(39.361,-3.282) ; v1(39.106,20.142) 39.108,20.14 39.408,20.14 v2(39.411,20.138) ; v1(39.294,14.461) 39.296,14.459 39.595,14.459 v2(39.599,14.457) ; v1(39.319,8.063) 39.321,8.065 39.621,8.065 v2(39.624,8.067) ; v2@43.308,17.751 43.31,17.753 43.61,17.753 v1(43.612,17.755)
  AHOR w0.102: v8@-5.388,43.179 v12(-5.08,43.18) ; v12(-5.059,15.541) v8(-4.75,15.539) ; v8(4.771,20.319) v12(5.08,20.32) ; v8(4.772,30.479) v12(5.081,30.481) ; v12(5.08,45.72) v8@5.388,45.719 ; v8@9.852,12.547 v12(10.16,12.548) ; v12(13.868,16.338) v8(14.177,16.336)
  BOT w0.127: v12(13.868,16.338) 15.109,17.578 TP617.1@15.109,17.724
  BOT w0.2: TP617.1@15.109,17.724 15.165,17.78 TP617.1@15.24,17.78
  BOT w0.45: v6@24.387,41.631 24.437,41.681 v6(24.486,41.681)
  other v1: 6.504,10.091 -7.112,11.034 -17.113,12.636 -3.174,12.7 -2.424,13.05 9.73,14.08 -3.234,14.834 16.397,15.697 11.602,16.7 9.449,16.917 12.176,17.088 2.041,17.226 11.51,27.26 14.959,40.462 15.346,40.462
  other v2: -3.765,11.943 -4.12,12.696 4.594,14.654 -12.985,15.491 -3.245,15.679 16.081,15.696 -6.27,16.021 12.305,16.704 12.155,21.546 14.655,21.554 13.655,22.054 14.655,23.054 11.815,27.264 15.037,35.442
  other v3: -10.441,-0.638 -8.941,-0.638 -7.441,-0.638 -5.941,-0.638 -1.441,-0.638 0.059,-0.638 6.059,-0.638 7.559,-0.638 9.059,-0.638 10.559,-0.638 -10.441,0.862 -8.941,0.862 -1.441,0.862 1.559,0.862 6.059,0.862 9.059,0.862 10.559,0.862 -13.441,2.362 -11.941,2.362 -10.441,2.362 -8.941,2.362 -7.441,2.362 4.559,2.362 6.059,2.362 7.559,2.362 9.059,2.362 10.559,2.362 12.059,2.362 13.559,2.362 -10.441,6.862 -8.941,6.862 -7.441,6.862 -5.941,6.862 6.059,6.862 7.559,6.862 9.059,6.862 10.559,6.862 -13.441,8.362 -11.941,8.362 -10.441,8.362 -8.941,8.362 -7.441,8.362 6.059,8.362 7.559,8.362 9.059,8.362 10.559,8.362 12.059,8.362 13.559,8.362 -14.941,9.862 -13.441,9.862 -11.941,9.862 -10.441,9.862 -8.941,9.862 7.559,9.862 9.059,9.862 10.559,9.862 12.059,9.862 13.559,9.862 15.059,9.862 -16.441,11.362 -14.941,11.362 -13.441,11.362 -11.941,11.362 -10.441,11.362 -8.941,11.362 -4.441,11.362 3.059,11.362 4.559,11.362 6.059,11.362 7.559,11.362 10.559,11.362 15.059,11.362 -17.941,12.862 -16.441,12.862 -14.941,12.862 -13.441,12.862 -8.941,12.862 -7.441,12.862 4.559,12.862 6.059,12.862 7.559,12.862 12.059,12.862 13.559,12.862 15.059,12.862 16.559,12.862 18.059,12.862 -19.441,14.362 -16.441,14.362 -14.941,14.362 -13.441,14.362 -10.441,14.362 -8.941,14.362 -7.441,14.362 -5.941,14.362 3.059,14.362 6.059,14.362 7.559,14.362 9.059,14.362 13.559,14.362 16.559,14.362 19.559,14.362 -19.441,15.862 -17.941,15.862 -16.441,15.862 -8.941,15.862 -7.441,15.862 0.059,15.862 3.059,15.862 4.559,15.862 6.059,15.862 7.559,15.862 9.059,15.862 10.559,15.862 12.059,15.862 19.559,15.862 -17.941,17.362 -16.441,17.362 -5.941,17.362 -4.441,17.362 0.059,17.362 4.559,17.362 7.559,17.362 9.059,17.362 10.559,17.362 18.059,17.362 19.559,17.362 -16.441,18.862 -11.941,18.862 -7.441,18.862 -5.941,18.862 -4.441,18.862 0.059,18.862 9.059,18.862 10.559,18.862 12.059,18.862 21.059,18.862 -17.941,20.362 -13.441,20.362 -5.941,20.362 -4.441,20.362 0.059,20.362 18.059,20.362 21.059,20.362 -17.941,21.862 -16.441,21.862 -14.941,21.862 -13.441,21.862 -11.941,21.862 -10.441,21.862 -8.941,21.862 -7.441,21.862 -5.941,21.862 -4.441,21.862 0.059,21.862 18.059,21.862 19.559,21.862 -17.941,23.362 -16.441,23.362 -14.941,23.362 -13.441,23.362 -11.941,23.362 -8.941,23.362 -5.941,23.362 -2.941,23.362 0.059,23.362 3.059,23.362 4.559,23.362 13.559,23.362 18.059,23.362 21.059,23.362 -20.941,24.862 -17.941,24.862 -16.441,24.862 -11.941,24.862 -10.441,24.862 -8.941,24.862 -7.441,24.862 -2.941,24.862 7.559,24.862 15.059,24.862 19.559,24.862 -16.441,26.362 -8.941,26.362 -5.941,26.362 -2.941,26.362 1.559,26.362 4.559,26.362 7.559,26.362 19.559,26.362 -17.941,27.862 -16.441,27.862 -14.941,27.862 -13.441,27.862 -7.441,27.862 -2.941,27.862 1.559,27.862 3.059,27.862 7.559,27.862 15.059,27.862 18.059,27.862 19.559,27.862 -19.441,29.362 -16.441,29.362 -14.941,29.362 -13.441,29.362 -10.441,29.362 -7.441,29.362 -5.941,29.362 1.559,29.362 3.059,29.362 4.559,29.362 7.559,29.362 15.059,29.362 19.559,29.362 -19.441,30.862 -16.441,30.862 -14.941,30.862 -13.441,30.862 -7.441,30.862 1.559,30.862 4.559,30.862 15.059,30.862 19.559,30.862 -19.441,32.362 -17.941,32.362 -14.941,32.362 -10.441,32.362 -8.941,32.362 -5.941,32.362 -2.941,32.362 0.059,32.362 4.559,32.362 -17.941,33.862 -10.441,33.862 -8.941,33.862 -7.441,33.862 -5.941,33.862 -2.941,33.862 -1.441,33.862 0.059,33.862 3.059,33.862 4.559,33.862 16.559,33.862 -17.941,35.362 -16.441,35.362 -10.441,35.362 -8.941,35.362 -7.441,35.362 -5.941,35.362 -4.441,35.362 -2.941,35.362 -1.441,35.362 0.059,35.362 1.559,35.362 3.059,35.362 4.559,35.362 9.059,35.362 10.559,35.362 -17.941,36.862 -14.941,36.862 -11.941,36.862 -10.441,36.862 -8.941,36.862 -7.441,36.862 -5.941,36.862 -4.441,36.862 -2.941,36.862 -1.441,36.862 0.059,36.862 1.559,36.862 3.059,36.862 4.559,36.862 10.559,36.862 15.059,36.862 18.059,36.862 -17.941,38.362 -16.441,38.362 -13.441,38.362 -11.941,38.362 -10.441,38.362 -8.941,38.362 -7.441,38.362 -5.941,38.362 -4.441,38.362 -2.941,38.362 -1.441,38.362 0.059,38.362 1.559,38.362 3.059,38.362 4.559,38.362 9.059,38.362 10.559,38.362 18.059,38.362 -17.941,39.862 -16.441,39.862 -13.441,39.862 -10.441,39.862 -8.941,39.862 -7.441,39.862 -5.941,39.862 -4.441,39.862 -2.941,39.862 -1.441,39.862 0.059,39.862 1.559,39.862 3.059,39.862 4.559,39.862 9.059,39.862 15.059,39.862 18.059,39.862 -17.941,41.362 -16.441,41.362 -13.441,41.362 -10.441,41.362 -8.941,41.362 -7.441,41.362 -5.941,41.362 -4.441,41.362 -2.941,41.362 -1.441,41.362 1.559,41.362 3.059,41.362 4.559,41.362 7.559,41.362 10.559,41.362 15.059,41.362 16.559,41.362 -16.441,42.862 -10.441,42.862 -8.941,42.862 -7.441,42.862 -5.941,42.862 -4.441,42.862 -2.941,42.862 0.059,42.862 1.559,42.862 3.059,42.862 7.559,42.862 15.059,42.862 16.559,42.862 -16.441,44.362 -10.441,44.362 -8.941,44.362 -7.441,44.362 -5.941,44.362 -4.441,44.362 -2.941,44.362 -1.441,44.362 0.059,44.362 1.559,44.362 3.059,44.362 4.559,44.362 6.059,44.362 10.559,44.362 15.059,44.362 16.559,44.362 -16.441,45.862 -10.441,45.862 -8.941,45.862 -7.441,45.862 -5.941,45.862 -2.941,45.862 -1.441,45.862 0.059,45.862 1.559,45.862 3.059,45.862 6.059,45.862 15.059,45.862 -16.441,47.362 -14.941,47.362 -10.441,47.362 -8.941,47.362 -7.441,47.362 -5.941,47.362 -4.441,47.362 -2.941,47.362 -1.441,47.362 0.059,47.362 1.559,47.362 3.059,47.362 4.559,47.362 6.059,47.362 7.559,47.362 9.059,47.362 10.559,47.362 16.559,47.362
  other v4: 6.811,8.312 6.183,9.758 -15.687,10.005 8.596,11.249 -7.432,11.367 13.574,11.394 -4.87,11.592 -3.76,11.606 -2.74,11.592 -15.689,11.732 9.855,12.216 -17.435,12.303 -4.115,13.028 -3.495,13.028 5.308,13.266 -3.49,13.467 9.411,13.747 10.442,13.737 18.22,13.84 4.593,13.884 11.255,14.402 -4.115,14.467 -3.555,14.501 4.595,14.99 18.224,14.997 -12.98,15.154 -4.754,15.209 -4.37,15.342 -3.24,15.342 16.077,15.364 -12.378,15.616 14.173,16.006 -0.955,16.046 18.215,16.153 -6.265,16.353 11.28,16.367 12.31,16.367 16.079,16.457 9.77,16.584 16.693,16.609 1.72,16.893 11.855,17.416 14.458,17.625 16.693,17.702 19.367,18.186 4.775,19.988 14.66,21.217 13.66,21.717 16.245,22.708 14.66,22.717 12.53,22.883 19.811,23.575 18.859,23.622 11.831,26.932 11.841,28.046 4.776,30.149 -5.385,42.848 5.385,45.388
  other v5: -18.941,-6.638 -11.441,-6.638 -8.941,-6.638 -1.441,-6.638 1.059,-6.638 3.559,-6.638 6.059,-6.638 11.059,-6.638 21.059,-6.638 26.059,-6.638 38.559,-6.638 31.059,-4.138 33.559,-4.138 36.059,-4.138 38.559,-4.138 41.059,-4.138 43.559,-4.138 26.059,-1.638 41.059,-1.638 43.559,-1.638 31.059,0.862 33.559,0.862 41.059,0.862 43.559,0.862 26.059,3.362 31.059,3.362 33.559,3.362 38.559,3.362 41.059,3.362 43.559,3.362 41.059,5.862 43.559,5.862 41.059,8.362 41.059,10.862 41.059,13.362 28.559,18.362 41.059,18.362 31.059,20.862 33.559,20.862 41.059,20.862 43.559,20.862 31.059,23.362 33.559,23.362 38.559,23.362 41.059,23.362 43.559,23.362 28.559,25.862 31.059,25.862 38.559,25.862 41.059,25.862 43.559,25.862 38.559,28.362 26.059,30.862 31.059,30.862 38.559,30.862 36.059,33.362 38.559,33.362 31.059,35.862 33.559,35.862 36.059,35.862 38.559,35.862 41.059,35.862 43.559,35.862 36.059,38.362 38.559,38.362 41.059,38.362 43.559,38.362 36.059,40.862 38.559,40.862 41.059,40.862 43.559,40.862 31.059,43.362 33.559,43.362 36.059,43.362 38.559,43.362 41.059,43.362 43.559,43.362 -2,44.5 31.059,45.862 33.559,45.862 36.059,45.862 38.559,45.862 31.059,48.362 33.559,48.362 36.059,48.362 38.559,48.362 28.559,50.862 31.059,50.862 33.559,50.862 36.059,50.862 38.559,50.862 31.059,53.362 33.559,53.362 36.059,53.362 38.559,53.362 41.059,53.362 43.559,53.362 28.559,55.862 31.059,55.862 33.559,55.862 36.059,55.862 38.559,55.862 41.059,55.862 43.559,55.862 36.059,58.362 38.559,58.362 41.059,58.362 43.559,58.362 -21.441,63.362 -18.941,63.362 -16.441,63.362 -13.941,63.362 -3.941,63.362 -1.441,63.362 1.059,63.362 8.559,63.362 -21.441,65.862 -11.441,65.862 -3.941,65.862 -1.441,65.862 1.059,65.862 6.059,65.862 21.059,65.862 23.559,65.862 26.059,65.862 28.559,65.862 31.059,65.862 33.559,65.862 -21.441,68.362 -18.941,68.362 -16.441,68.362 -13.941,68.362 -11.441,68.362 -8.941,68.362 -6.441,68.362 -3.941,68.362 -1.441,68.362 1.059,68.362 3.559,68.362 6.059,68.362 8.559,68.362 11.059,68.362 13.559,68.362 16.059,68.362 21.059,68.362 23.559,68.362 26.059,68.362 28.559,68.362 31.059,68.362 33.559,68.362 36.059,68.362 41.059,68.362 43.559,68.362 -21.441,70.862 -18.941,70.862 -16.441,70.862 -13.941,70.862 -11.441,70.862 -8.941,70.862 -6.441,70.862 -3.941,70.862 -1.441,70.862 1.059,70.862 3.559,70.862 6.059,70.862 8.559,70.862 11.059,70.862 13.559,70.862 16.059,70.862 18.559,70.862 21.059,70.862 23.559,70.862 26.059,70.862 28.559,70.862 31.059,70.862 33.559,70.862 36.059,70.862 38.559,70.862 41.059,70.862 43.559,70.862 -21.441,73.362 -18.941,73.362 -16.441,73.362 -13.941,73.362 -11.441,73.362 -8.941,73.362 -6.441,73.362 -3.941,73.362 -1.441,73.362 1.059,73.362 3.559,73.362 6.059,73.362 8.559,73.362 11.059,73.362 13.559,73.362 16.059,73.362 18.559,73.362 21.059,73.362 23.559,73.362 26.059,73.362 28.559,73.362 31.059,73.362 33.559,73.362 36.059,73.362 38.559,73.362 41.059,73.362 43.559,73.362 -21.441,75.862 -18.941,75.862 -16.441,75.862 -13.941,75.862 -11.441,75.862 -8.941,75.862 -6.441,75.862 -3.941,75.862 -1.441,75.862 1.059,75.862 3.559,75.862 6.059,75.862 8.559,75.862 11.059,75.862 13.559,75.862 16.059,75.862 18.559,75.862 21.059,75.862 23.559,75.862 26.059,75.862 28.559,75.862 31.059,75.862 33.559,75.862 36.059,75.862 38.559,75.862 41.059,75.862 43.559,75.862 -18.941,78.362 -16.441,78.362 -11.441,78.362 -8.941,78.362 -6.441,78.362 -3.941,78.362 -1.441,78.362 1.059,78.362 3.559,78.362 6.059,78.362 8.559,78.362 11.059,78.362 13.559,78.362 16.059,78.362 18.559,78.362 21.059,78.362 23.559,78.362 26.059,78.362 28.559,78.362 31.059,78.362 33.559,78.362 36.059,78.362 38.559,78.362
  other v6: -0.178,-7.722 25.781,7.112 28.346,13.538 25.73,13.818 32.639,28.448 19.05,32.868 24.663,32.868 37.287,42.062 17.937,45.098 19.042,45.129 20.042,45.129 21.042,45.129 22.042,45.129 23.042,45.129 24.075,45.129 25.045,45.129 26.136,45.129 17.01,45.226 16.256,45.296 38.1,45.441 27.126,45.888 18,46 19,46 20,46 21,46 22,46 23,46 24,46 24.943,46 26,46.11 17.133,46.355 -16.002,47.371 -15.57,47.362 26,50.928 27.5,51 26,52 27.5,52 -8.661,52.502 26,53 27.5,53 8.636,53.543 6.985,53.619 11.252,53.644 26,54 27.5,54 18.898,54.019 3.378,54.051 18.898,54.899 26,55 27.5,55 1.88,55.194 4.115,55.575 15.068,55.778 16.764,55.778 18.898,55.778 -5.996,55.884 26,56 27.5,56 -8.839,56.54 8.636,56.642 26,57 27.5,57 -8.594,57.389 26,58 27.5,58 26,59 27.5,59 35.5,59 36.5,59 37.5,59 38.399,59 39.5,59 40.5,59 41.5,59 42.5,59 43.5,59 44.5,59 26,60 27.5,60 35.5,60 26,61 27.5,61 35.5,61 27.596,61.768 26,62 28.5,62 29.5,62 30.5,62 31.5,62 32.5,62 33.5,62 34.5,62 35.5,62 26.5,62.934 27.5,62.934 28.5,62.934 29.5,62.934 30.5,62.934 31.5,62.934 32.5,62.934 33.5,63 34.5,63 35.5,63 35.5,64 35.5,65 36,65.5 44,65.985 36.5,66 37.5,66 39.5,66 42,66 45,66 40.5,66.035 43,66.022
  other v7: 31.59,10.672 33.006,10.672 38.176,10.666 31.803,11.865 33.01,11.865 37.973,11.859 17.78,33.02
  other v8: 9.851,12.546 -5.389,43.178 5.389,45.718
  other v9: 16.766,54.018 16.352,54.897
  other v10: -14.191,0.112 -9.691,0.112 -14.191,1.612 -11.191,1.612 -9.691,1.612 -8.191,1.612 -14.191,9.112 -6.691,9.112 11.309,9.112 14.309,9.112 11.309,10.612 20.309,16.612 8.309,18.112 20.309,19.612 -2.191,21.112 -21.107,21.7 -8.191,22.612 -20.191,24.112 20.309,24.112 -20.191,25.612 -18.691,25.612 -17.191,25.612 -14.191,25.612 -12.691,25.612 20.309,25.612 -20.191,27.112 -18.691,31.612 -18.691,33.112 -18.691,34.612 18.809,34.612 -18.691,36.112 6.809,36.112 -15.691,37.612 -3.691,37.612 -0.691,37.612 0.809,37.612 -3.691,39.112 -0.691,39.112 -17.191,42.112 -17.191,43.612 -14.191,43.612 -3.691,43.612 5.309,43.612 15.809,43.612 17.309,43.612 -17.191,45.112 -15.691,45.112 -9.691,45.112 -8.191,45.112 -6.691,45.112 -3.691,45.112 -2.191,45.112 6.809,45.112 8.309,45.112 -11.191,46.612 -9.691,46.612 -8.191,46.612 -6.691,46.612 -5.191,46.612 -3.691,46.612 -2.191,46.612 -0.691,46.612 0.809,46.612 2.309,46.612 5.309,46.612
  other v11: -9.534,-1.151 34.508,10.138 17.831,54.019 17.831,55.778
  other v13: 17.12,54.148 16.732,54.897
  other v16: 17.45,54.22 17.057,54.897
  other v20: -15.691,46.612
HPF_1V5: R910.1 R912.1 TP904.1 U903.A1 U903.C2 U904.2 | length 23.1
  TOP w0.102: v7(-7.442,27.254) -7.24,27.457 R910.1@-7.24,27.929 v1(-7.24,27.934) ; v1(-7.417,23.452) -7.417,23.969 -6.784,24.602 U904.2@-5.959,24.602 ; U903.C2@-2.915,29.312 -2.466,28.863 v1(-2.094,28.863)
  DVERT w0.102: v2(-7.804,23.446) -7.81,23.452 -7.81,26.887 v7(-7.442,27.254) ; v4(-6.935,27.607) v2(-6.935,27.938) ; v2(-3.587,29.065) v4(-3.587,29.396) ; v4(-1.804,29.189) -1.791,29.177 -1.791,28.871 v2(-1.778,28.858) ; v2(-1.803,29.714) v4(-1.803,30.045)
  AVERT w0.102: v8(-7.046,29.761) -7.046,27.773 -6.935,27.662 v4(-6.935,27.607) ; v4(-3.587,29.396) v8(-3.586,29.728) ; v4(-1.804,29.189) -1.803,29.7 v8(-1.81,29.707) -1.819,29.716 -1.807,29.729 -1.807,30.041 v4(-1.803,30.045)
  DHOR w0.102: v2(-7.804,23.446) -7.801,23.449 -7.42,23.449 v1(-7.417,23.452) ; v1(-7.24,27.934) -7.238,27.936 v2@-6.938,27.936 ; v1(-3.913,29.075) -3.908,29.07 -3.593,29.07 v2@-3.588,29.065 ; v1(-2.108,29.718) -2.106,29.716 -1.807,29.716 v2(-1.803,29.714) ; v1(-2.094,28.863) -2.091,28.86 -1.78,28.86 v2(-1.778,28.858)
  AHOR w0.102: v8(-7.046,29.761) -7.029,29.744 -3.602,29.744 v8(-3.586,29.728) -1.859,29.728 -1.838,29.707 v8(-1.81,29.707)
  BOT w0.102: TP904.1@-10.16,25.4 -9.296,25.4 v7(-7.442,27.254)
HV_EN: C713.2 C714.2 R707.1 R708.1 R715.2 TP708.1 U301.L11 U701.4 U703.8 U703.10 | length 57.7
  TOP w0.127: R715.2@-22.251,25.095 v1(-19.609,25.095) ; v7(-18.31,26.45) -19.45,26.45 -19.6,26.3 -19.609,26.291 v1(-19.609,25.095) ; C713.2@-13.34,21.844 C714.2@-13.34,22.53 -12.993,22.53 -12.707,22.244 -12.325,22.244 U703.8@-12.316,22.234 -11.866,22.234 -11.616,21.984 U703.10@-11.616,21.469 ; U703.10@-11.651,21.469 -11.651,21.41 -11.666,21.395 -15.17,21.395 -15.455,21.11 -19.495,21.11 -19.609,21.224 v1(-19.609,25.095) ; U703.10@-11.616,21.437 -11.566,21.387 -9.113,21.387 -8.891,21.609 R708.1@-8.891,22.984 ; v1(10.596,24.818) 10.596,24.811 10.85,24.557 U301.L11@10.85,24.55
  DHOR w0.127: v1@-19.6,25.104 -14.669,25.104 -14.59,25.025 -5.692,25.025 -5.527,25.19 -1.349,25.19 -0.848,24.689 2.503,24.689 2.942,25.128 4.658,25.128 5.127,24.658 6.773,24.658 7.007,24.892 9.767,24.892 9.851,24.809 10.587,24.809 v1(10.596,24.818)
  BOT w0.127: v7(-18.31,26.45) -17.795,26.965 TP708.1@-17.795,27.955
HVSW_EN: R710.1 TP710.1 U301.L9 U706.2 | length 19.9
  TOP w0.076: U706.2@4.283,15.291 4.508,15.291 4.688,15.471 R710.1@4.953,15.471 4.915,15.508 v7(4.915,16.281) ; v1(11.592,25.256) 11.599,25.249 11.599,24.801 U301.L9@11.85,24.55
  DVERT w0.076: v7(4.915,16.281) 5.216,16.582 5.216,24.401 5.086,24.531 v2(5.086,25.271)
  DHOR w0.076: v2(5.086,25.271) 5.103,25.289 11.525,25.289 11.558,25.256 v1(11.592,25.256)
  BOT w0.076: v7(4.915,16.281) 4.915,16.343 5.177,16.605 5.177,17.107 5.08,17.204 TP710.1@5.08,17.78 TP710.1@5.177,17.683
I2C2.SCL: R707.2 U301.K10 U703.1 U1102.6 | length 37.4
  TOP w0.076: v1(10.144,24.308) 10.151,24.301 11.099,24.301 U301.K10@11.35,24.05
  TOP w0.1: U703.1@-10.916,21.734 v1(-10.134,21.734) -9.891,21.734 -9.741,21.884 R707.2@-9.716,21.884
  DVERT w0.076: v2(-9.563,21.736) -9.558,21.73 -9.558,18.394 v2(-9.552,18.388) ; v2@-9.563,21.739 -9.378,21.924 v2(-9.378,24.6)
  DHOR w0.076: v1(-17.25,18.1) -16.26,18.1 -16.067,17.907 -14.188,17.907 -14.014,18.081 -14.014,18.194 -13.819,18.388 v2(-9.552,18.388) ; v1(-10.134,21.734) -9.891,21.734 -9.889,21.736 v2(-9.563,21.736) ; v2(-9.378,24.6) -6.788,24.6 -6.707,24.681 -6.082,24.681 -5.734,24.334 -1.202,24.334 -1.196,24.328 6.91,24.328 7.143,24.562 9.448,24.562 9.6,24.409 9.702,24.308 v1(10.144,24.308)
I2C2.SDA: R708.2 U301.K11 U703.2 U1102.8 | length 38.1
  TOP w0.076: v1(10.594,23.799) 10.599,23.799 U301.K11@10.85,24.05
  TOP w0.1: v1(-10.916,22.234) -10.176,22.234 -9.743,22.668 -9.743,22.857 R708.2@-9.716,22.884
  DVERT w0.076: v2(-11.517,24.372) -11.517,23.355 -11.405,23.242 v2@-11.405,18.608
  DHOR w0.076: v1(-17.25,19.101) -16.591,19.101 -15.879,18.388 -14.035,18.388 -13.882,18.54 -11.498,18.54 -11.434,18.604 v2(-11.4,18.604) ; v2(-11.517,24.372) -11.505,24.384 -6.788,24.384 -6.644,24.529 -6.145,24.529 -5.359,23.743 -2.882,23.743 -2.508,24.117 -1.247,24.117 -0.873,23.743 1.385,23.743 1.76,24.117 3.02,24.117 3.394,23.743 6.54,23.743 7.206,24.409 9.384,24.409 9.6,24.194 9.736,24.058 10.335,24.058 v1(10.594,23.799) ; v2(-11.405,22.225) -11.4,22.23 -10.92,22.23 v1(-10.916,22.234)
IMP_EN: TP902.1 U301.E1 U902.B2 U904.7 U905.2 U906.2 | length 56.2
  TOP w0.076: U905.2@-6.031,21.85 -5.715,21.85 -5.615,21.75 v1(-5.581,21.75) ; U301.E1@15.85,21.55 v1(16.25,21.55)
  DVERT w0.076: v2(-4.394,33.962) -4.394,32.629 -3.983,32.219 -3.983,27.736 v7(-3.745,27.497) -3.745,26.513 -3.835,26.423 v2(-3.835,24.587) v2(-3.835,21.757) -3.835,14.234 -3.782,14.18 -3.769,14.18 -3.667,14.078 v2(-3.632,14.078)
  DHOR w0.076: v1(-7.395,33.749) -7.177,33.967 -4.399,33.967 v2(-4.394,33.962) ; v1(-5.581,21.75) -5.577,21.754 -3.839,21.754 v2(-3.835,21.757) ; v1(-4.638,27.497) v7(-3.745,27.497) v7@-3.734,27.508 ; v2(-3.835,24.587) -3.828,24.595 -3.396,24.595 v1(-3.389,24.602) ; v2(-3.632,14.078) -3.038,14.078 -2.85,14.265 3.714,14.265 4.131,13.849 4.346,13.849 4.749,13.849 5.41,14.509 10.435,14.509 10.73,14.214 11.277,14.214 11.58,13.911 12.186,13.911 12.428,14.153 13.772,14.153 14.25,14.63 14.477,14.63 15.824,15.978 15.824,17.145 16.764,18.085 16.764,20.898 16.6,21.062 16.257,21.404 16.257,21.543 v1(16.25,21.55)
  BOT w0.076: TP902.1@-5.08,27.94 -4.42,27.94 -4.012,27.532 -3.78,27.532 v7(-3.745,27.497)
IMP_ENn: R903.2 TP906.1 U900.4 U901.4 U905.5 U905.6 | length 18.8
  TOP w0.076: U905.6@-5.131,22.2 U905.5@-5.131,21.85 -4.775,21.85 -4.546,21.62 v1(-4.546,20.828) ; U901.4@-3.935,32.781 -3.912,32.804 -3.912,32.944 -3.785,33.071 v7@-3.404,33.071 ; v7(-3.401,33.068) -3.401,32.662 -3.404,32.66 -3.404,31.75 -3.251,31.598 -2.845,31.598 U900.4@-2.819,31.572
  DVERT w0.076: v2(-3.563,20.824) -3.563,26.358 -3.32,26.601 -3.32,32.925 -3.401,33.006 v7(-3.401,33.068)
  DHOR w0.076: v1(-4.546,20.828) -4.544,20.826 v2(-3.563,20.824) v2(-3.563,20.824)
  BOT w0.076: v7(-3.401,33.068) -2.588,33.068 TP906.1@-2.54,33.02
IMP_IN+_SEL: U301.D2 U901.8 | length 47.6
  TOP w0.076: U301.D2@15.35,21.05 15.601,20.799 16.049,20.799 v1(16.056,20.792)
  DVERT w0.076: v2(-5.703,33.391) -5.703,33.357 -5.652,33.305 -5.652,24.245 -5.448,24.04 v2(-5.448,14.634)
  DHOR w0.076: v2(-5.703,33.391) -5.699,33.395 -5.357,33.395 v1(-5.353,33.4) ; v2(-5.448,14.634) -5.413,14.634 -5.35,14.697 -5.058,14.697 -4.662,14.3 -3.031,14.3 -2.634,14.697 3.935,14.697 4.198,14.434 4.509,14.434 4.513,14.439 4.684,14.439 5.058,14.813 10.561,14.813 10.73,14.645 10.856,14.519 11.035,14.519 13.627,14.519 14.043,14.935 14.35,14.935 15.519,16.104 15.519,17.271 16.459,18.211 16.459,20.389 v1(16.056,20.792)
IMP_IN-_SEL0: U301.E2 U900.8 | length 42.1
  TOP w0.076: U301.E2@15.35,21.55 15.601,21.299 16.049,21.299 v1(16.056,21.292)
  DVERT w0.076: v2(-1.246,14.481) -1.246,16.253 -1.17,16.329 -1.17,27.437 -1.248,27.515 -1.248,30.762 v2(-1.051,30.96)
  DHOR w0.076: v1(-1.395,30.958) -1.393,30.959 v2(-1.051,30.96) v2(-1.051,30.96) ; v2(-1.246,14.481) 3.713,14.481 4.194,14.001 4.686,14.001 5.346,14.661 10.498,14.661 10.793,14.367 11.34,14.367 11.643,14.064 12.123,14.064 12.365,14.305 13.709,14.305 14.187,14.783 14.413,14.783 15.672,16.041 15.672,17.208 16.612,18.148 16.612,20.737 v1(16.056,21.292)
IMP_IN-_SEL1: U301.D3 U900.7 | length 29.8
  TOP w0.076: v1(-1.801,30.48) U900.7@-1.801,30.954
  DVERT w0.076: v2(15.066,21.277) 15.09,21.3 15.411,21.3 16.561,22.45 16.561,25.8 v2(16.561,30.861)
  DHOR w0.076: v1(-1.801,30.48) -1.796,30.48 -1.693,30.377 8.893,30.377 9.377,30.861 11.467,30.861 13.267,30.861 v2(16.561,30.861) ; v1@14.851,21.051 14.851,21.056 v2@15.064,21.27
  other v1: 14.85,21.05
IMP_IN-_SEL2: U301.E3 U901.9 | length 34
  TOP w0.076: U301.E3@14.85,21.55 14.85,21.569 15.077,21.796 v1(15.077,21.815)
  DVERT w0.076: v2(15.339,21.581) 15.339,21.615 15.475,21.751 15.475,23.299 16.021,23.845 16.021,25.8 16.021,28.238 16.226,28.443 16.226,32.274 v2(16.239,32.287)
  DHOR w0.076: v1(-5.572,32.781) -1.914,32.781 -1.65,33.045 7.194,33.045 7.943,32.297 16.229,32.297 v2(16.239,32.287) ; v1(15.077,21.815) 15.091,21.815 15.325,21.581 v2(15.339,21.581)